# Altium PCB PCB.PcbDoc (part 1 of 2)
Units mil, origin at the board's own origin, x right, y up, seen from the top; angles counter-clockwise.
Board outline 3265 x 2770 mil, 2 copper layers (Top Layer, Bottom Layer); 55 components, 72 nets, 277 pads, 54 vias.
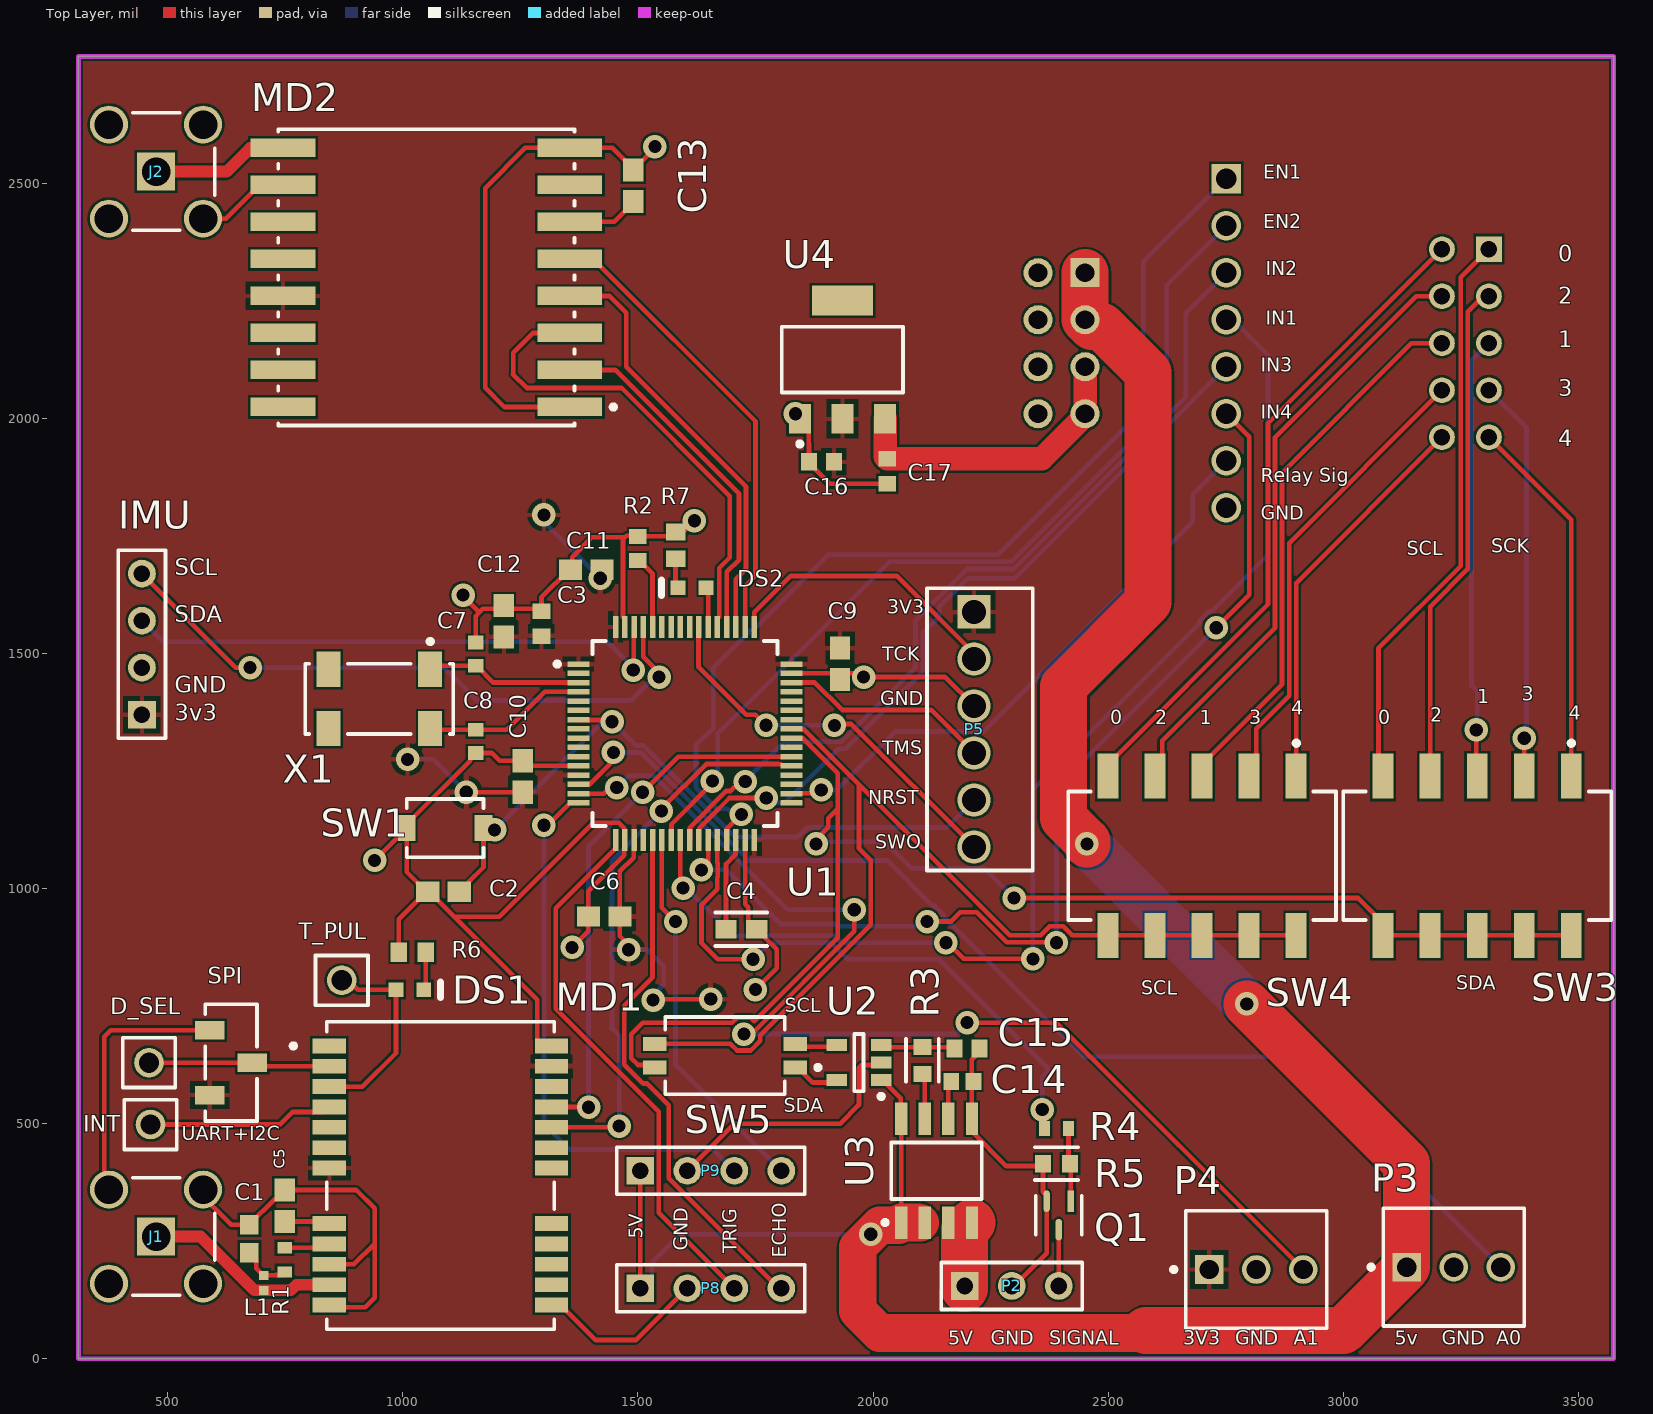
[diagram p0: Top Layer view]
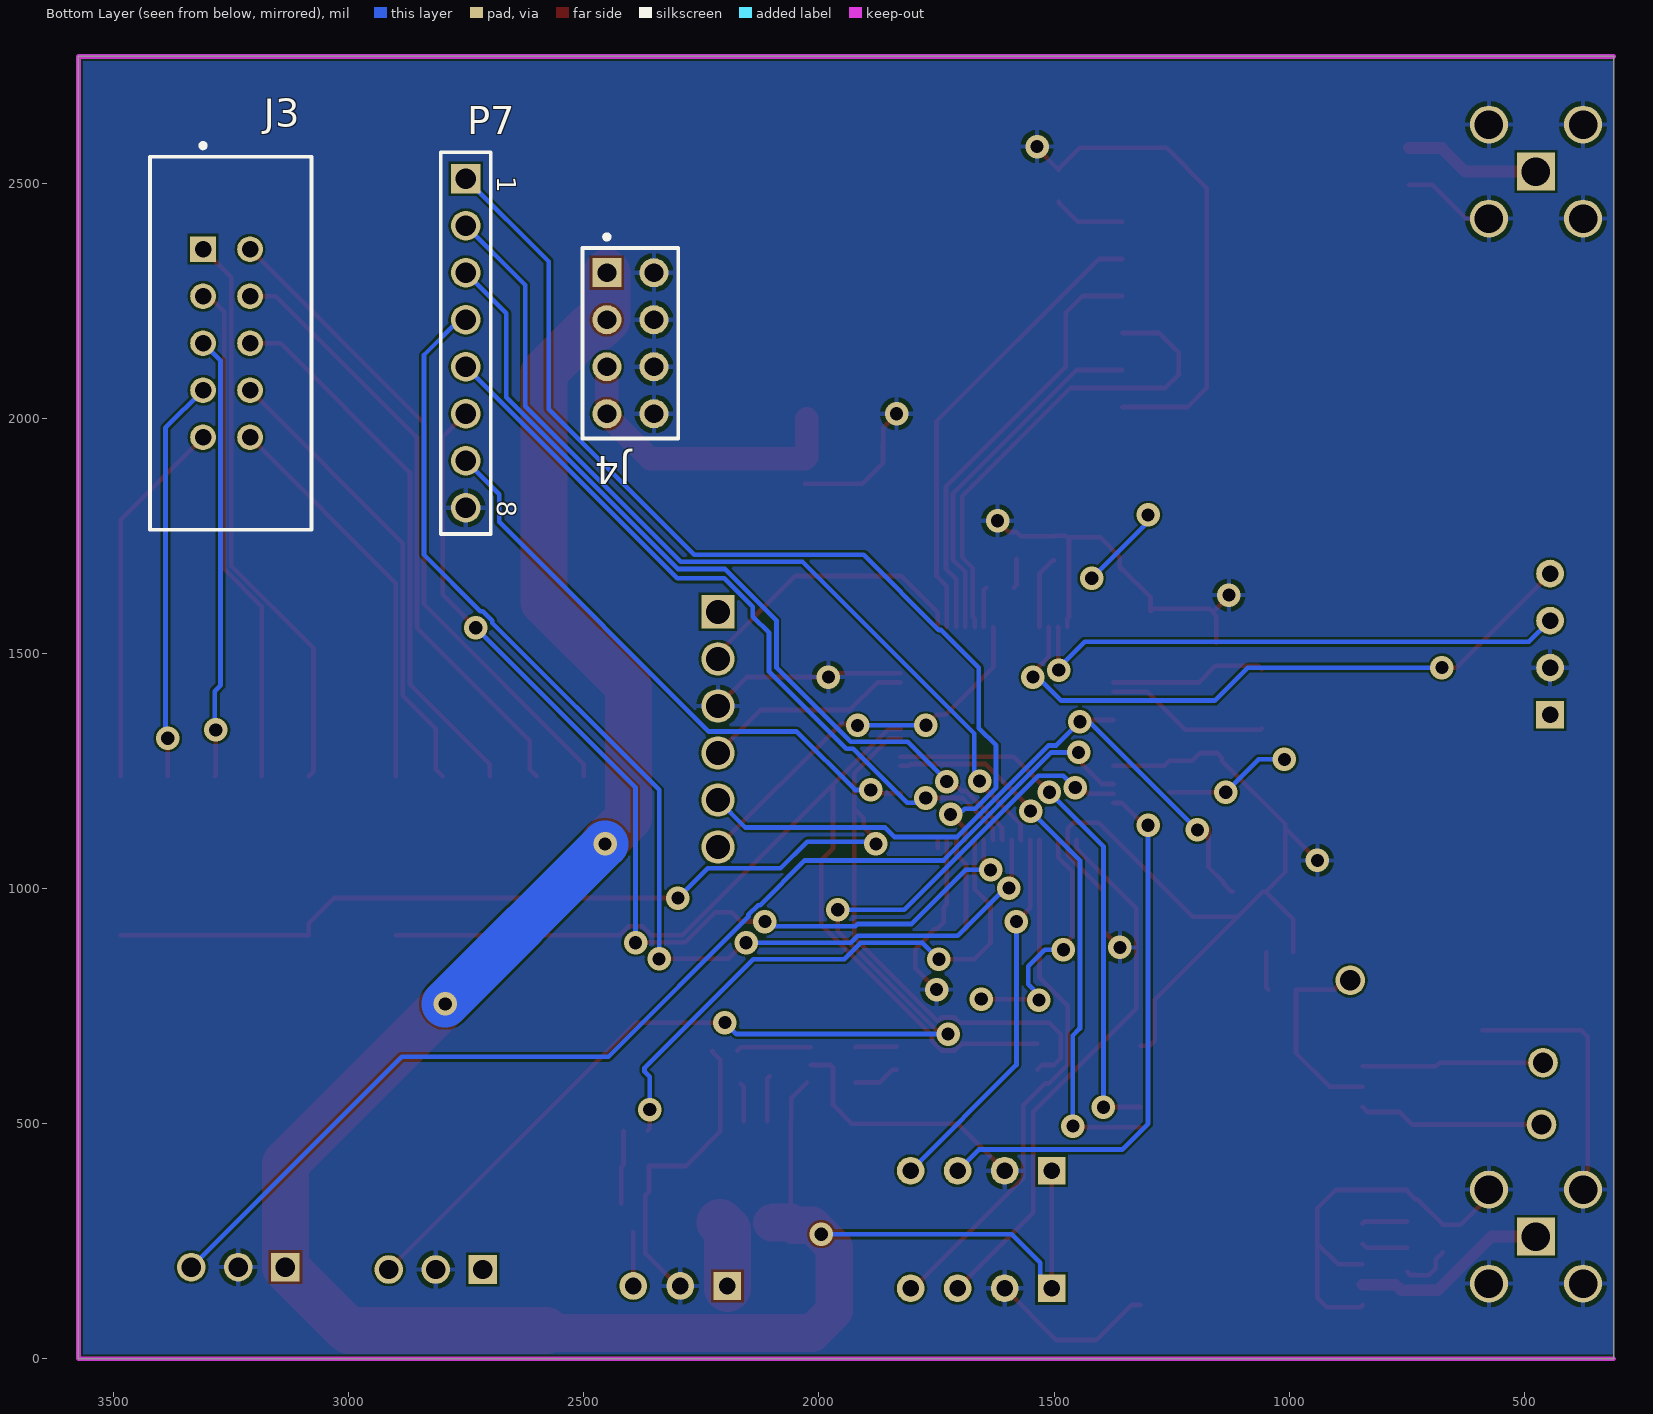
[diagram p1: Bottom Layer view, seen from below]
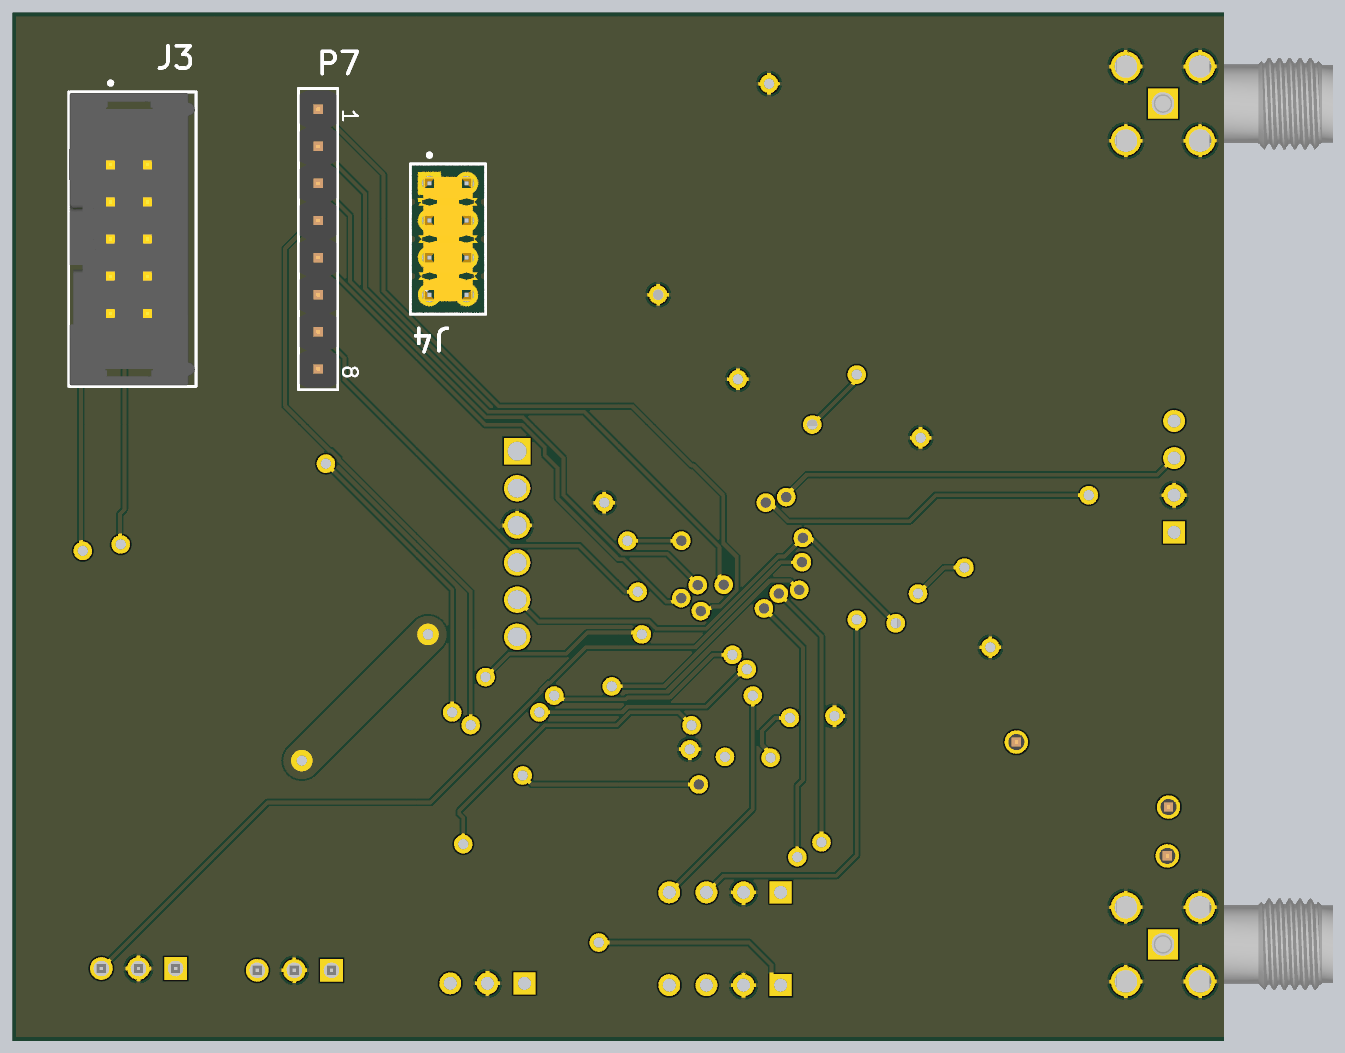
[diagram p2: 3D render of the assembled board from below, using the file's embedded part models]

## Layer stack, top to bottom
Top Solder: solder mask 0.4, Solder Resist, Dk 3.5
Top Layer: signal copper 1.4
Dielectric 1: dielectric 12.6, FR-4, Dk 4.8
Bottom Layer: signal copper 1.4
Bottom Solder: solder mask 0.4, Solder Resist, Dk 3.5

## Board outline
310,0 3575,0 3575,2770 310,2770

## Design rules (kind name [scope] priority, off if disabled: settings)
Clearance [All] p1: gap=5 ignorepadtopadclearanceinfootprint=FALSE except(0: Arc-Hole Track-Hole SMDPad-Hole THPad-Hole Via-Hole Fill-Hole Poly-Hole Region-Hole Text-Hole)
PolygonConnect [All] p1: connectstyle=Relief reliefconductorwidth=10 reliefentries=4 polygonreliefangle="90 Angle" airgapwidth=10
RoutingVias [All] p1: holewidth=28 width=50 viastyle="Through Hole" minholewidth=28 minwidth=50 maxholewidth=28 maxwidth=50
SolderMaskExpansion [All] p1: expansion=4 istentingtop=FALSE
Width [All] p1: maxlimit=100 minlimit=10 preferedwidth=10 minimp=50.000000 maximp=50.000000 favimp=50.000000
30 further rules are at their usual default settings.

## Components (designator, comment, footprint, x,y, rotation, side; value= is the part's Value field where it differs from the comment)
C1 "0603YC104KAT2A" CAPC1608X90X35NL15T15 673.78,255.6 r90 top
C2 "0603YC104KAZ2A" CAPC1608X90X35ML15T15 1086.38,993.62 r180 top
C3 "GRM188R61E105KA12D" CAPC1608X90X35NL10T15 1294.84,1563.62 r270 top
C4 "CL10X475KQ8NNNC" FP-CL10-IPC_A 1719.84,913.62 r180 top
C5 "0603YC104KAZ2A" CAPC1608X90X35ML15T15 748.78,325.6 r90 top
C6 "0603YC104KAZ2A" CAPC1608X90X35ML15T15 1428.06,940.85 r0 top
C7 "GQM1885C2A4R3BB01D" CAPC1608X90X35LL10T15 1154.84,1498.62 r90 top
C8 "GQM1885C2A4R3BB01D" CAPC1608X90X35LL10T15 1154.84,1313.23 r90 top
C9 "0603YC104KAZ2A" CAPC1608X90X35ML15T15 1929.84,1478.62 r90 top
C10 "0603YC104KAZ2A" CAPC1608X90X35ML15T15 1254.84,1238.62 r270 top
C11 "0603YC104KAZ2A" CAPC1608X90X35ML15T15 1389.84,1678.62 r0 top
C12 "0603YC104KAZ2A" CAPC1608X90X35ML15T15 1214.84,1568.62 r270 top
C13 "0603YC104KAZ2A" CAPC1608X90X35ML15T15 1490,2495 r270 top
C14 "1nF" CAPC1608X95X40LL15T15 2190,590 r180 top
C15 "GRM188R60J106ME47D" CAPC1608X90X35NL10T15 2200,660 r180 top
C16 "GRM188R61E105KA12D" CAPC1608X90X35NL10T15 1890.24,1907.72 r0 top
C17 "GRM188R61E105KA12D" CAPC1608X90X35NL10T15 2030.24,1887.72 r90 top
D_SEL "61300111121" 61300111121 460,630 r0 top (schematic designator J5)
DS1 "HSMS-C190" AVAG-HSMX-C190_V 1015,785 r0 top
DS2 "HSMG-C190" AVAG-HSMX-C190_V 1615,1640 r180 top
IMU "Header 4" HDR1X4 445,1370 r90 top (schematic designator P1)
INT "61300111121" 61300111121 463.33,498.34 r0 top (schematic designator J6)
J1 "731000114" MOLX-731000114_V 475,260 r0 top
J2 "731000114" MOLX-731000114_V 475,2525 r0 top
J3 "D2510-6002-AR" FP-D2510-6002-AR-MFG 3251.14,2160 r270 bottom
J4 "HTSW-104-07-G-D" FP-HTSW-104-07-G-D-MFG 2401.14,2160 r270 bottom
L1 "LQG15HS27NJ02D" IND1005X55X25LL5T10 703.78,161.55 r90 top
MD1 "NEO-M9N-00B" FP-NEO-M9N-00B-MFG 1080,390 r90 top
MD2 "RFM95W-868S2" FP-RFM95W-868S2-MFG 1050,2300 r180 top
P2 "Header 3" HDR1X3 2195,155 r0 top
P3 "22-23-2031" MOLX-22-23-2031_V 3235,195 r0 top
P4 "22-23-2031" MOLX-22-23-2031_V 2815,190 r0 top
P5 "640456-6" TECO-640456-6_V 2214.84,1588.62 r270 top
P7 "61300811121" 61300811121 2751.14,2160 r270 bottom
P8 "Header 4" HDR1X4 1505,150 r0 top
P9 "Header 4" HDR1X4 1505,400 r0 top
Q1 "2N7002W" FP-419AB-01-IPC_C 2395,305 r270 top
R1 "RC0603JR-1310RL" RESC1608X55X25LL10T15 748.78,210.6 r270 top
R2 "CRCW060310K0FKEA" RESC1609X50X30NL8T20 1499.84,1723.62 r270 top
R3 "MCT0603MD1002BP100" FP-MCT0603-IPC_B 2105,635 r90 top
R4 "RC0603FR-101KL" RESC1608X55X25LL10T15 2390,490 r0 top
R5 "MCT0603MD1002BP100" FP-MCT0603-IPC_B 2390,415 r0 top
R6 "ERJ3EKF3300V" RESC1608X55X30ML15T15 1020,865 r180 top
R7 "ERJ3EKF3300V" RESC1608X55X30ML15T15 1580,1730 r90 top
SPI "CJS-1201TA" FP-CJS-1201TA-MFG 634.72,630 r270 top (schematic designator SW2)
SW1 "TL1015AF160QG" FP-TL1015AF160QG-MFG 1089.84,1128.62 r0 top
SW3 "219-5LPSTR" FP-219-5LPSTR-MFG 3285,1070 r180 top
SW4 "219-5LPSTR" FP-219-5LPSTR-MFG 2700,1070 r180 top
SW5 "1571983-3" FP-1571983-3-MFG 1685,645 r180 top
T_PUL "61300111121" 61300111121 870,805 r0 top (schematic designator J7)
U1 "STM32F401RET6" FP-LQFP64-5W-MFG 1600,1330 r0 top
U2 "MCP3221A7T-E/OT" SOT-23-OT5_N 1970,630 r180 top
U3 "ACS712ELCTR-05B-T" ALEG-LC-8_V 2135,400 r0 top
U4 "AZ1117EH-3.3TRG1" FP-SOT223-MFG 1935,2125 r90 top
X1 "ABS25-32.768KHZ-6-T" ABRA-ABS25-4_V 949.84,1403.62 r180 top

## Footprints (in the part's own frame and the unit in brackets; to place one, negate y for a bottom-side part, rotate by r counter-clockwise, add the part's x,y. Pads: shape width x height; smd on the part's side, far side on the other; paste and mask are expansions set on the pad)
61300111121 [mm] "Pin Header, pitch 2.54 mm, THT, Vertical, single row, 1p"
  round 1.6 hole 1.1: 1(0,0)
  silkscreen extent -1.42,-1.35 1.42,1.35, body extent -1.27,-1.27 1.27,1.27, height 8.57
61300811121 [mm] "Pin Header, pitch 2.54 mm, THT, Vertical, single row, 8p"
  rect 1.6x1.6 hole 1.1: 1(-8.89,0)
  round 1.6 hole 1.1: 2(-6.35,0) 3(-3.81,0) 4(-1.27,0) 5(1.27,0) 6(3.81,0) 7(6.35,0) 8(8.89,0)
  silkscreen extent -10.31,-1.35 10.31,1.35, body extent -10.16,-1.27 10.16,1.27, height 8.57
ABRA-ABS25-4_V [mm] "SMD, 4-Leads, Body 8x3.8mm, Pitch 5.5mm, Height 2.5mm"
  rect 1.3x1.9 smd: 1(-2.75,-1.6) 2(2.75,-1.6) 3(2.75,1.6) 4(-2.75,1.6)
  silkscreen extent -4,-3.22 4,1.9, body extent -4,-2 4,2, height 2.66
ALEG-LC-8_V [mm] "SOIC, 8-Leads, Body 4.9x3.9mm, Pitch 1.27mm"
  rect 0.65x1.75 smd: 1(-1.905,-2.8) 2(-0.635,-2.8) 3(0.635,-2.8) 4(1.905,-2.8) 5(1.905,2.8) 6(0.635,2.8) 7(-0.635,2.8) 8(-1.905,2.8)
  silkscreen extent -2.9,-2.92 2.45,1.53, body extent -2.45,-1.95 2.45,1.95, height 1.75
AVAG-HSMX-C190_V [mm] "SMD, 2-Leads, Body 1.6x0.8mm, Height 0.9mm"
  rect 0.8x0.8 smd: 1(-0.75,0) 2(0.75,0)
  silkscreen extent 1.65,-0.4 1.65,0.4, body extent -0.8,-0.4 0.8,0.4, height 0.9
CAPC1608X90X35LL10T15 [mm] "Chip Capacitor, 2-Leads, Body 1.60x0.80mm, IPC High Density"
  rect 0.75x0.85 smd: 1(-0.625,0) 2(0.625,0)
  body extent -0.85,-0.45 0.85,0.45, height 0.9
CAPC1608X90X35ML15T15 [mm] "Chip Capacitor, 2-Leads, Body 1.60x0.81mm, IPC Low Density"
  rect 1.25x1.1 smd: 1(-0.85,0) 2(0.85,0)
  body extent -0.88,-0.48 0.87,0.48, height 0.9
CAPC1608X90X35NL10T15 [mm] "Chip Capacitor, 2-Leads, Body 1.60x0.80mm, IPC Medium Density"
  rect 0.85x0.95 smd: 1(-0.675,0) 2(0.675,0)
  body extent -0.85,-0.45 0.85,0.45, height 0.9
CAPC1608X90X35NL15T15 [mm] "Chip Capacitor, 2-Leads, Body 1.75x0.95mm, IPC Medium Density"
  rect 1.05x1 smd: 1(-0.75,0) 2(0.75,0)
  body extent -0.88,-0.48 0.87,0.48, height 0.9
CAPC1608X95X40LL15T15 [mm] "Chip Capacitor, 2-Leads, Body 1.60x0.80mm, IPC High Density"
  rect 0.85x0.9 smd: 1(-0.6,0) 2(0.6,0)
  body extent -0.87,-0.48 0.88,0.48, height 0.95
FP-219-5LPSTR-MFG [mm]
  rect 1.13x2.44 smd paste+0 mask+0: 1(-5.08,-4.3) 2(-2.54,-4.3) 3(0,-4.3) 4(2.54,-4.3) 5(5.08,-4.3) 6(5.08,4.3) 7(2.54,4.3) 8(0,4.3) 9(-2.54,4.3) 10(-5.08,4.3)
  silkscreen extent -7.23,-6.2 7.23,3.47, body extent -7.33,-5.62 7.33,5.62, height 0.25
FP-419AB-01-IPC_C [mm]
  rect 1.164x0.336 smd paste+0 mask+0: 1(-0.77,0.65)
  rrect100% 1.164x0.336 smd paste+0 mask+0: 2(-0.77,-0.65) 3(0.77,0)
  silkscreen extent -1.05,-1.25 1.05,1.25
FP-1571983-3-MFG [mm]
  rect 1.27x0.76 smd paste+0 mask+0: 1(-3.795,0.635) 2(-3.795,-0.635) 3(3.795,-0.635) 4(3.795,0.635)
  silkscreen extent -5.15,-2.08 3.22,2.08, body extent -4.53,-2.18 4.53,2.18, height 0.25
FP-CJS-1201TA-MFG [mm]
  rect 1x1.6 smd paste+0 mask+0: 1(-1.75,-1.15) 2(0,1.15) 3(1.75,-1.15)
  silkscreen extent -3.15,-1.4 3.15,1.4, body extent -3.25,-2.05 3.25,2.05, height 0.25
FP-CL10-IPC_A [mil]
  rect 45.6x39.85 smd paste+0 mask+0: 1(-32.56,0) 2(32.56,0)
  silkscreen extent -55,-36 55,36, body extent -75,-40 75,40, height 10
FP-D2510-6002-AR-MFG [mm]
  rect 1.39x1.39 hole 0.89 paste-1000 mask+0: 1(-5.08,-1.495)
  round 1.39 hole 0.89 paste-1000 mask+0: 2(-5.08,1.045) 3(-2.54,-1.495) 4(-2.54,1.045) 5(0,-1.495) 6(0,1.045) 7(2.54,-1.495) 8(2.54,1.045) 9(5.08,-1.495) 10(5.08,1.045)
  silkscreen extent -10.8,-4.36 10.07,4.36, body extent -10.01,-4.34 10.01,4.29, height 10.04
FP-HTSW-104-07-G-D-MFG [mm]
  rect 1.57x1.57 hole 1.02 paste-1000 mask+0: 1(-3.81,-1.27)
  round 1.57 hole 1.02 paste-1000 mask+0: 2(-3.81,1.27) 3(-1.27,-1.27) 4(-1.27,1.27) 5(1.27,-1.27) 6(1.27,1.27) 7(3.81,-1.27) 8(3.81,1.27)
  silkscreen extent -5.87,-2.58 5.14,2.58, body extent -5.08,-2.51 5.08,2.51, height 8.71
FP-LQFP64-5W-MFG [mm]
  rect 1.2x0.3 smd paste+0 mask+0: 1(-5.75,3.75) 2(-5.75,3.25) 3(-5.75,2.75) 4(-5.75,2.25) 5(-5.75,1.75) 6(-5.75,1.25) 7(-5.75,0.75) 8(-5.75,0.25) 9(-5.75,-0.25) 10(-5.75,-0.75) 11(-5.75,-1.25) 12(-5.75,-1.75) 13(-5.75,-2.25) 14(-5.75,-2.75) 15(-5.75,-3.25) 16(-5.75,-3.75) 33(5.75,-3.75) 34(5.75,-3.25) 35(5.75,-2.75) 36(5.75,-2.25) 37(5.75,-1.75) 38(5.75,-1.25) 39(5.75,-0.75) 40(5.75,-0.25) 41(5.75,0.25) 42(5.75,0.75) 43(5.75,1.25) 44(5.75,1.75) 45(5.75,2.25) 46(5.75,2.75) 47(5.75,3.25) 48(5.75,3.75)
  rect 0.3x1.2 smd paste+0 mask+0: 17(-3.75,-5.75) 18(-3.25,-5.75) 19(-2.75,-5.75) 20(-2.25,-5.75) 21(-1.75,-5.75) 22(-1.25,-5.75) 23(-0.75,-5.75) 24(-0.25,-5.75) 25(0.25,-5.75) 26(0.75,-5.75) 27(1.25,-5.75) 28(1.75,-5.75) 29(2.25,-5.75) 30(2.75,-5.75) 31(3.25,-5.75) 32(3.75,-5.75) 49(3.75,5.75) 50(3.25,5.75) 51(2.75,5.75) 52(2.25,5.75) 53(1.75,5.75) 54(1.25,5.75) 55(0.75,5.75) 56(0.25,5.75) 57(-0.25,5.75) 58(-0.75,5.75) 59(-1.25,5.75) 60(-1.75,5.75) 61(-2.25,5.75) 62(-2.75,5.75) 63(-3.25,5.75) 64(-3.75,5.75)
  silkscreen extent -7.02,-5 5,5, body extent -6.45,-6.45 6.45,6.45, height 0.25
FP-MCT0603-IPC_B [mil]
  rect 34x37.88 smd paste+0 mask+0: 1(-28.72,0) 2(28.72,0)
  silkscreen extent -46,-35 46,35, body extent -56,-29 56,29, height 10
FP-NEO-M9N-00B-MFG [mm]
  rect 0.8x1.8 smd paste-1000 mask-1000: 1(7,6) 2(5.9,6) 3(4.8,6) 4(3.7,6) 5(2.6,6) 6(1.5,6) 7(0.4,6) 8(-2.6,6) 9(-3.7,6) 10(-4.8,6) 11(-5.9,6) 12(-7,6) 13(-7,-6) 14(-5.9,-6) 15(-4.8,-6) 16(-3.7,-6) 17(-2.6,-6) 18(0.4,-6) 19(1.5,-6) 20(2.6,-6) 21(3.7,-6) 22(4.8,-6) 23(5.9,-6) 24(7,-6)
  silkscreen extent -8.3,-6.15 8.3,8.07, body extent -8.4,-7.4 8.4,7.4, height 0.25
FP-RFM95W-868S2-MFG [mm]
  rect 3.5x1 smd paste+0 mask+0: 1(-7.75,7) 2(-7.75,5) 3(-7.75,3) 4(-7.75,1) 5(-7.75,-1) 6(-7.75,-3) 7(-7.75,-5) 8(-7.75,-7) 9(7.75,-7) 10(7.75,-5) 11(7.75,-3) 12(7.75,-1) 13(7.75,1) 14(7.75,3) 15(7.75,5) 16(7.75,7)
  silkscreen extent -10.23,-8 8,8, body extent -9.6,-8.1 9.6,8.1, height 0.25
FP-SOT223-MFG [mm]
  rect 1.6x1.2 smd paste+0 mask+0: 1(-3.2,2.3) 2(-3.2,0) 3(-3.2,-2.3)
  rect 1.6x3.3 smd paste+0 mask+0: 4(3.2,0)
  silkscreen extent -4.67,-3.27 1.78,3.27, body extent -4.1,-3.37 4.1,3.37, height 0.25
FP-TL1015AF160QG-MFG [mm]
  rect 0.95x1.4 smd paste+0 mask+0: 1(-2.075,0) 2(2.075,0)
  silkscreen extent -2.07,-1.58 2.07,1.58, body extent -2.65,-1.68 2.65,1.68, height 0.25
HDR1X3 [mm] "Connector; Header; 3 Position"
  rect 1.5x1.5 hole 0.9: 1(0,0)
  round 1.5 hole 0.9: 2(2.54,0) 3(5.08,0)
  silkscreen extent -1.27,-1.27 6.35,1.27
HDR1X4 [mm] "Connector; Header; 4 Position"
  rect 1.5x1.5 hole 0.9: 1(0,0)
  round 1.5 hole 0.9: 2(2.54,0) 3(5.08,0) 4(7.62,0)
  silkscreen extent -1.27,-1.27 8.89,1.27
IND1005X55X25LL5T10 [mm] "Chip Inductor, 2-Leads, Body 1.05x0.55mm, IPC High Density"
  rect 0.49x0.52 smd: 1(-0.405,0) 2(0.405,0)
  body extent -0.53,-0.28 0.53,0.28, height 0.55
MOLX-22-23-2031_V [mm] "CONN, 3-Leads, Body 7.62x6.35mm, Pitch 2.54mm"
  rect 1.55x1.55 hole 1.05: 1(-2.54,0)
  round 1.55 hole 1.05: 2(0,0) 3(2.54,0)
  silkscreen extent -4.58,-3.17 3.81,3.17, body extent -3.73,-3.25 3.73,3.1, height 10.67
MOLX-731000114_V [mm] "Connector, 5-Leads, Body 14.8x6.35mm, Pitch 2.54mm"
  rect 2.05x2.05 hole 1.54: 1(0,0)
  round 2.05 hole 1.54: 2(-2.54,2.54) 3(-2.54,-2.54) 4(2.54,-2.54) 5(2.54,2.54)
  silkscreen extent -1.26,-3.17 3.17,3.17, body extent -11.62,-3.17 3.18,3.18, height 9.57
RESC1608X55X25LL10T15 [mm] "Chip Resistor, 2-Leads, Body 1.60x0.80mm, IPC High Density"
  rect 0.6x0.8 smd: 1(-0.65,0) 2(0.65,0)
  body extent -0.85,-0.45 0.85,0.45, height 0.55
RESC1608X55X30ML15T15 [mm] "Chip Resistor, 2-Leads, Body 1.60x0.80mm, IPC Low Density"
  rect 0.9x1.05 smd: 1(-0.725,0) 2(0.725,0)
  body extent -0.87,-0.48 0.87,0.48, height 0.55
RESC1609X50X30NL8T20 [mm] "Chip Resistor, 2-Leads, Body 1.65x0.95mm, IPC Medium Density"
  rect 0.8x0.95 smd: 1(-0.65,0) 2(0.65,0)
  body extent -0.82,-0.48 0.82,0.48, height 0.5
SOT-23-OT5_N [mm] "SOT23, 5-Leads, Body 2.9x1.7mm, Pitch 0.95mm, Lead Span 2.8mm, IPC Medium Density"
  rect 1.1x0.65 smd: 1(-1.2,0.95) 2(-1.2,0) 3(-1.2,-0.95) 4(1.2,-0.95) 5(1.2,0.95)
  silkscreen extent -1.33,-1.55 0.25,1.95, body extent -0.9,-1.55 0.9,1.55, height 1.45
TECO-640456-6_V [mm] "THD, 6-Leads, Body 15.24x5.72mm, Pitch 2.54mm"
  rect 1.8x1.8 hole 1.3: 1(0,0)
  round 1.8 hole 1.3: 2(2.54,0) 3(5.08,0) 4(7.62,0) 5(10.16,0) 6(12.7,0)
  silkscreen extent -1.27,-2.54 13.97,3.18, body extent -1.27,-2.54 13.97,3.18, height 10.03

## Part data
C1: library part CMP-1661-00001-4, "Chip Capacitor, 100 nF, +/- 10%, 16 V, -55 to 125 degC, 0603 (1608 Metric), RoHS, Tape and Reel", Manufacturer=AVX, Max Operating Temperature="125 degC", Min Operating Temperature="-55 degC", Package Quantity=4000, Voltage Rating="16 V", ComponentLink1Description="Manufacturer URL", ComponentLink1URL=http://www.avx.com/, ComponentLink2Description=Datasheet, ComponentLink2URL=http://datasheets.avx.com/X7RDielectric.pdf, DatasheetVersion=06/2016, Height="0.9 mm", Length="1.6 mm", Mount="Surface Mount", Mounting Technology="Surface Mount", PackageDescription="2-Pin Surface Mount Device, Body 1.6 x 0.81 mm", PackageReference=0603, Packaging="Tape and Reel", Pins=2, REACH SVHC="No SVHC", RoHSCompliant=true
C2 C5 C6 C9 C10 C11 C12 C13: library part CMP-2006-04496-1, Manufacturer="AVX Interconnect / Elco", Part Number=0603YC104KAZ2A
C3 C16 C17: library part CMP-2006-02459-1, Manufacturer=Murata, Part Number=GRM188R61E105KA12D
C4: library part CMP-13271-001817-1, "Cap Ceramic 4.7uF 6.3V X6S ±10% Pad SMD 0603 +105°C T/R", Capacitance=4.7uF, Case Code (Imperial)=0603, Case Code (Metric)=1608, Dielectric=X6S, Max Operating Temperature=105°C, Min Operating Temperature=-55°C, Package Quantity=1, Tolerance=10%, Voltage Rating=6.3V, Case/Package=0603, Depth=0.8mm, Height=0.8mm, Lead Free="Lead Free", Length=1.6mm, Mount="Surface Mount", Packaging="Tape and Reel", Radiation Hardening=No, Thickness=0.035inch, Voltage Rating (DC)=6.3V, Width=0.031inch
C7 C8: library part CMP-2006-02448-1, Manufacturer=Murata, Part Number=GQM1885C2A4R3BB01D
C14: library part CMP-2006-02121-1, Manufacturer=Vitramon, Part Number=VJ0603Y102KXACW1BC
C15: library part CMP-2006-02792-1, Manufacturer=Murata, Part Number=GRM188R60J106ME47D
D_SEL INT T_PUL: library part CMP-1502-01058-1, "THT Vertical Pin Header WR-PHD, Pitch 2.54 mm, Single Row, 1 pins", Contact Resistance=20mOhm, Manufacturer="Wurth Elektronik", Operating Temperature=-40to105degC, Rated Current=3A, Withstanding Voltage=500VAC, Working Voltage=250VAC, Datasheet URL=https://katalog.we-online.de/em/datasheet/6130xx11121.pdf, Gender=Male, Manufacturer URL=http://www.we-online.de, Mounting Technology=THT, Orientation=Vertical, Package Reference=61300111121, Packaging=Bag, Part Number=61300111121, Pin Number=1, Pitch=2.54mm, Publisher=WurthElektronik, Row Number=Single
DS1: library part CMP-2000-06427-1, "LED Uni-Color Red, 52 mW, 20 mA, -40 to 85 degC, 2-Pin SMD, RoHS, Tape and Reel", Emitting Color=Red, Forward Current=25mA, Forward Voltage=2.6V, Manufacturer=Avago, Operating Temp Range=-40Cto85C, Operating Temperature Classification=Industrial, Package Description="2-Pin Surface Mount Device, Body 1.6 x 0.8 mm, Height 0.9 mm", Package Reference=HSMX-C190, Package Type=ChipLed, Power Dissipation=52W, Reverse Voltage=5V, Test Current (It)=20mA, Chip Material=GaP, Datasheet URL=http://docs.avagotech.com/docs/AV02-0551EN, Datasheet Version=03/2012, DELETED=Compliant, Dominant Wave Length=626nm, High Brightness=No, Lens Dimensions=1x0.8x0.5mm, Lens Type=ColorlessDiffused, Lum Intensity=10mcd, Luminous Intensity=10mcd, Main Category=ChipLED, Manufacturer URL=http://www.avagotech.com/, Mounting=SurfaceMount, Mounting Technology=SurfaceMount, Number of  Elements=1, Packaging=TapeandReel, Peak Wavelength=630nm, Pin Count=2, Product Depth (mm)=0.8mm, Product Height (mm)=0.8mm, Product Length (mm)=1.6mm, Rad Hardened=No, Shape Type=Rectangular, Type=Uni-Color, Viewing Angle=170deg
DS2: library part CMP-1744-00002-1, "Chip LED, Green, 2.2 V, -40 to 85 degC, 2-Pin SMD, RoHS, Tape and Reel", Case\Package=SOIC, Clock Frequency="100 KHz", Frequency="400 KHz", Max Operating Temperature="85 degC", Max Supply Voltage="5.5 V", Min Operating Temperature="-40 degC", Min Supply Voltage="1.7 V", Nominal Supply Current="2 mA", Package Quantity=3000, Access Time="3500 ns", ComponentLink1Description="Manufacturer URL", ComponentLink1URL=http://www.avagotech.com/, ComponentLink2Description=Datasheet, ComponentLink2URL=http://docs.avagotech.com/docs/AV02-0551EN, ComponentLink3Description="Package Specification", ComponentLink3URL=http://www.fairchildsemi.com/dwg/MA/MA03D.pdf, DatasheetVersion=Mar-12, Density="32 kb", Height="1.5 mm", Interface=Serial, Length="5 mm", Max Clock Frequency="100 KHz", Mount="Surface Mount", PackageDescription="2-Pin Surface Mount Device, Body 1.6 x 0.8 mm, Height 0.9 mm", PackageReference=HSMX-C190, Packaging="Tape and Reel", Pins=8, Radiation Hardening=No, REACH SVHC="No SVHC", RoHSCompliant=true, Width="4 mm"
IMU P8 P9: "Header, 4-Pin", LatestRevisionDate=17-Jul-2002, LatestRevisionNote="Re-released for DXP Platform.", Publisher="Altium Limited"
J1 J2: library part CMP-2000-05487-1, "SMA Right-Angle PCB Jack Receptacle, Brass Body, Gold Plated, 50 Ohm, 5-Pin THD, RoHS, Tray", Manufacturer=Molex, Package Description="5-Pin Through Hole Device, Body 14.8 x 6.35 mm, Pitch 2.54 mm", Datasheet URL=http://www.molex.com/webdocs/datasheets/pdf/en-us/0731000114_RF_COAX_CONNECTORS.pdf, Datasheet Version=09/2016, Manufacturer URL=http://www.molex.com/, Mounting Technology=ThroughHole, Package Reference=731000114, Package URL=http://www.molex.com/pdm_docs/sd/731000114_sd.pdf
J3: library part CMP-05379-000002-1, "CONN HEADER VERT 10POS 2.54MM", Current Rating=1.75A, Manufacturer=3M, Temperature="-55°C to +105°C", Temperature Range High=+105°C, Temperature Range Low=-55°C, Automotive=No, Category=Conn, ComponentLink2Description=Datasheet, ComponentLink2URL=http://multimedia.3m.com/mws/media/485877O/3m-four-wall-header-d2500-series-ts-2244.pdf, Conn Gender=Male, Conn Orientation=Straight, Contact Material=Gold,Nickel, Device Class L1=Connectors, Device Class L2="Headers and Wire Housings", Device Class L3=unset, Digikey Description="CONN HEADER VERT 10POS 2.54MM", Height=10.04mm, Lead Free=Yes, Manufacturer Part Number=D2510-6002-AR, Mouser Description="Headers & Wire Housings 10P 4WALL HEADER STRT L-PRO THRU-HOLE", Number Of Contacts=10, Number Of Rows=2, Octopart=https://octopart.com/d2510-6002-ar-3m-8399032, Package=D2510-6002-AR, Pitch=2.54mm, RoHS=TRUE
J4: library part CMP-02766-000066-1, "CONN HEADER VERT 8POS 2.54MM", Current Rating=6.3A, Manufacturer=Samtec, Temperature="-55°C to +125°C", Temperature Range High=+125°C, Temperature Range Low=-55°C, Voltage Rating=550V, Automotive=No, Category=Conn, ComponentLink2Description=Datasheet, ComponentLink2URL=http://suddendocs.samtec.com/prints/htsw-xxx-xx-xxx-x-xx-xx-xx-mkt.pdf, Conn Gender=Male, Conn Orientation=Straight, Contact Material=Gold,Nickel, Device Class L1=Connectors, Device Class L2="Headers and Wire Housings", Device Class L3=unset, Digikey Description="CONN HEADER VERT 8POS 2.54MM", Footprint Url=http://suddendocs.samtec.com/prints/htsw-xxx-xx-xxx-x-xx-xx-xx-footprint.pdf, Height=8.71mm, Lead Free=Yes, Manufacturer Part Number=HTSW-104-07-G-D, Number Of Contacts=8, Number Of Rows=2, Octopart=https://octopart.com/htsw-104-07-g-d-samtec-10613822, Package=HTSW-104-07-G-D, Pitch=2.54mm, RoHS=TRUE
L1: library part CMP-2000-06578-1, "Chip Inductor, 27 nH, 5%, 300 mA, -55 to 125 degC, 2-Pin SMD (0402), RoHS, Tape and Reel", Current Rating=300mA, DC Resistance (DCR)=460mOhmMax, Frequency - Self Resonant=1.7GHz, Frequency - Test=100MHz, Inductance=27nH, Manufacturer=Murata, Operating Temperature=-55°C~125°C, Package / Case=0402(1005Metric), Package Description="2-Pin Surface Mount Device, Body 1 x 0.5 mm", Package Reference=0402, Q @ Freq=8@100MHz, Standard Package=10,000, Tolerance=±5%, Catalog Drawings=LQG15HSSeriesTopLQG15HSSeriesEnd, Category=Inductors,Coils,Chokes, Datasheet URL=http://download.siliconexpert.com/pdfs/2010/9/19/0/28/16/422/mrt_/manual/l0075s0083lqg15hs.pdf, Datasheet Version=09/2010, Family=FixedInductors, Height - Seated (Max)="0.022\"(0.55mm)", Manufacturer URL=http://www.murata.com/, Material - Core=Air, Mounting Technology=SurfaceMount, Mounting Type=SurfaceMount, Online Catalog=LQG15HxSeries, Other Names=490-2628-2, Packaging=Tape&Reel(TR), Product Training Modules=InductorProducts, Series=LQG15HS, Shielding=Unshielded, Size / Dimension="0.039\"Lx0.020\"W(1.00mmx0.50mm)", Type=Multilayer
MD1: library part CMP-207130-000006-1, "M9 standard precision module", Manufacturer=u-blox, Max Supply Voltage=3.6V, Min Supply Voltage=1.65V, Package=0, Temperature="-40°C to +85°C", Temperature Range High=+85°C, Temperature Range Low=-40°C, Automotive=No, Category=UNK, ComponentLink2Description=Datasheet, ComponentLink2URL=https://www.u-blox.com/sites/default/files/NEO-M9N_DataSheet_%28UBX-19014285%29.pdf, Device Class L1="Integrated Circuits (ICs)", Device Class L2="RF Semiconductors and Devices", Device Class L3="RF Receivers", Footprint Url=https://www.u-blox.com/sites/default/files/NEO-M9N_Integrationmanual_%28UBX-19014286%29.pdf, Height=2.6mm, Interface=I2C,SPI,UART,USB, Lead Free=Yes, Manufacturer Part Number=NEO-M9N-00B, Octopart=https://octopart.com/neo-m9n-00b-u-blox-107315722, RoHS=TRUE, Sensitivity=-167dBm
MD2: library part CMP-204316-000001-1, "RX TXRX MODULE ISM < 1GHZ SMD", Case/Package=SMD/SMT, Current - Receiving=12.1mA, Current - Transmitting=120mA, Frequency=868MHz, Max Operating Temperature=70°C, Min Operating Temperature=-20°C, Data Rate=300Kbps, Interface=SPI, Mount="Surface Mount", Packaging=Bulk, Sensitivity=-123dBm
P2: "Header, 3-Pin", LatestRevisionDate=17-Jul-2002, LatestRevisionNote="Re-released for DXP Platform.", Publisher="Altium Limited"
P3 P4: library part CMP-2000-05242-1, "Male Header, Pitch 2.54 mm, 1 x 3 Position, Height 8.18 mm, Tail Length 3.56 mm, RoHS, Bulk", Current Rating=4A, Manufacturer=Molex, Voltage Rating=250V, Brand=Molex, Contact Gender=Pin(Male), Contact Material=Brass, Contact Plating=Tin, Datasheet URL=https://datasheet.ciiva.com/19472/232274-19472863.pdf, Datasheet Version=Sep-01, Factory Pack Quantity=16000, Housing Material=Nylon, Manufacturer URL=http://www.molex.com/, Mounting Angle=Vertical, Mounting Style=ThroughHole, Number of Positions=3Position, Number Of Rows=1Row, Packaging=Bulk, Pitch=2.54mm, Product=Headers, Product Category=Headers&WireHousings, RoHS=Details, Series=6373, Termination Style=ThroughHole, Tradename=KK, Type=Locking
P5: library part CMP-2000-05661-1, "Male Header, Pitch 2.54 mm, 1 x 6 Position, Height 10.03 mm, Tail Length 3.56 mm, -55 to 105 degC, Bulk", Color=White, Current, Rating="5 /  / A", Flammability Rating=UL94V-0, Manufacturer="TE Connectivity", Package Description="Male Header, Pitch 2.54 mm, 1 x 6 Position, Height 10.03 mm, Tail Length 3.56 mm", Temperature, Operating="-55to+105 /  / °C", Voltage, Rating="250 /  / V", Agency Approvals=CSA,UL, Angle=Straight, Brand/Series=MTA-100Series, Color, Housing=White, Connector Type=MTA-100, Contact Centerline Spacing="0.100 /  / in.", Contact Mating Area Plating=Tin, Contact Plating=Tin, Contact Shape=Square, Contact Termination Area Plating=Tin, Datasheet URL=https://datasheet.ciiva.com/25618/0900766b80eb7fdd-25618163.pdf, Datasheet Version="Rev. W, 05/2005", Length, Overall="0.6 /  / \"", Length, Pin="0.14 /  / \"", Length, Terminal Post="0.14 /  / in.", Manufacturer URL=http://www.te.com/, Material, Contact=CopperAlloy, Material, Housing=Polyester, Mount Angle=Vertical, Mounting Hole Size="0.04 /  / \"", Mounting Technology=ThroughHole, Mounting Type=PCMount, Number Of Contacts=6, Number of Positions=6, Number Of Rows=1, Package Reference=640456-6, Pin Spacing="0.1 /  / \"", Primary Type=InterconnectSystem, Size, Post="0.025 /  / in.", Special Features=Pinstrip, Standards=RoHSCompliant,ELVCompliant,UL94V-0, Termination=Solder, Type=PCBPlug
P7: library part CMP-1502-01076-1, "THT Vertical Pin Header WR-PHD, Pitch 2.54 mm, Single Row, 8 pins", Contact Resistance=20mOhm, Manufacturer="Wurth Elektronik", Operating Temperature=-40to105degC, Rated Current=3A, Withstanding Voltage=500VAC, Working Voltage=250VAC, Datasheet URL=https://katalog.we-online.de/em/datasheet/6130xx11121.pdf, Gender=Male, Manufacturer URL=http://www.we-online.de, Mounting Technology=THT, Orientation=Vertical, Package Reference=61300811121, Packaging=Bag, Part Number=61300811121, Pin Number=8, Pitch=2.54mm, Publisher=WurthElektronik, Row Number=Single
Q1: library part CMP-07173-000098-1, "MOSFET N-CH 60V 115MA SOT-323", Case/Package=SOT-323, Continuous Drain Current (ID)=115mA, Drain to Source Breakdown Voltage=60V, Drain to Source Resistance=7.5R, Gate to Source Voltage (Vgs)=20V, Input Capacitance=50pF, Max Operating Temperature=150°C, Max Power Dissipation=200mW, Min Operating Temperature=-55°C, Package Quantity=1, Threshold Voltage=1.76V, Contact Plating=Tin, Drain to Source Voltage (Vdss)=60V, Element Configuration=Single, Height=1mm, Lead Free="Lead Free", Length=2mm, Mount="Surface Mount", Number of Elements=1, Number of Pins=3, On-State Resistance=7.5R, Packaging="Tape and Reel", Power Dissipation=200mW, Radiation Hardening=No, Rds On Max=7.5R, REACH SVHC="No SVHC", Turn-Off Delay Time=12.5ns, Turn-On Delay Time=5.85ns, Weight=0.03g, Width=1.25mm
R1: library part CMP-2000-04315-1, Manufacturer=Yageo, Part Number=RC0603JR-1310RL
R2: library part CMP-1666-00005-4, "Chip Resistor, 10 KOhm, +/- 1%, 100 mW, -55 to 155 degC, 0603 (1608 Metric), RoHS, Tape and Reel", Manufacturer="Vishay Semiconductor", Max Operating Temperature="155 degC", Min Operating Temperature="-55 degC", Package Quantity=5000, Voltage Rating="75 V", ComponentLink1Description="Manufacturer URL", ComponentLink1URL=http://www.vishay.com/, ComponentLink2Description=Datasheet, ComponentLink2URL=https://datasheet.ciiva.com/11809/0900766b80d98afc-11809037.pdf, DatasheetVersion=06/2012, Height="0.45 mm", Length="1.55 mm", Mounting Technology="Surface Mount", PackageDescription="2-Pin Surface Mount Device, Body 1.575 x 0.85 mm", PackageReference=0603, Packaging="Tape and Reel", REACH SVHC=Unknown, RoHSCompliant=true
R3 R5: library part CMP-02407-000530-1, "RES SMD 100 OHM 1% 1/8W 0603", Case Code (Imperial)=0603, Case Code (Metric)=1608, Max Operating Temperature=155°C, Max Power Dissipation=125mW, Min Operating Temperature=-55°C, Package Quantity=1, RESISTANCE=10kR, Temperature Coefficient=25ppm/°C, Tolerance=0.1%, Voltage Rating=75V, Case/Package=0603, Composition="Thin Film", Contact Plating=Tin, Depth=0.85mm, Features="Automotive AEC-Q200", Height=0.45mm, Lead Free="Lead Free", Length=1.55mm, Military Standard=Not, Number of Terminations=2, Packaging="Tape and Reel", Power Rating=125mW, Radiation Hardening=No, REACH SVHC="No SVHC", Voltage Rating (DC)=75V, Width=0.033inch
R4: library part CMP-2000-04176-1, Manufacturer=Yageo, Part Number=RC0603FR-101KL
R6 R7: library part CMP-2000-00435-1, Manufacturer=Panasonic, Part Number=ERJ3EKF3300V
SPI: library part CMP-71745-000001-1, "SWITCH SLIDE SPDT 100MA 6V", Contact Current Rating=100mA, Contact Resistance=100mΩ, Manufacturer="Copal Electronics Inc", Operating Force=5.9N, Temperature="-40°C to +85°C", Temperature Range High=+85°C, Temperature Range Low=-40°C, Voltage Rating Dc=6V, Automotive=No, Category=Switch, ComponentLink2Description=Datasheet, ComponentLink2URL=https://www.nidec-copal-electronics.com/e/catalog/switch/cjs.pdf, Device Class L1=Electromechanical, Device Class L2=Switches, Device Class L3="Slide Switches", Digikey Description="SWITCH SLIDE SPDT 100MA 6V", Height=2.5mm, Lead Free=Yes, Manufacturer Part Number=CJS-1201TA, Mount="Surface Mount", Octopart=https://octopart.com/cjs-1201ta-nidec+copal-87363567, Package=CJS-1201TA, RoHS=TRUE, Standoff Height=0mm, Throw Configuration=SPDT
SW1: library part CMP-17879-000003-1, "SWITCH TACTILE SPST-NO 0.05A 12V", Case/Package=SMD/SMT, Color=Beige, Contact Current Rating=50mA, Contact Resistance=100mR, Max Operating Temperature=70°C, Max Voltage Rating (DC)=12V, Min Operating Temperature=-20°C, Operating Force=160gf, Package Quantity=1, Actuator Length=0.5mm, Actuator Material=Nylon, Actuator Type=Standard, Contact Material=Silver, Contact Plating=Silver, Current Rating=50mA, Electrical Life=50000Cycles, Illumination Type=Non-Illuminated, Lead Free="Lead Free", Mechanical Life=200000Cycles, Mount="Surface Mount", Orientation=Straight, Packaging="Tape and Reel", REACH SVHC="No SVHC", Switch Function=Off-Mom, Switch Travel=0.2mm, Termination="Gull Wing", Throw Configuration=SPST, Voltage Rating (DC)=12V
SW3 SW4: library part CMP-07018-000003-1, "SWITCH SLIDE DIP SPST 100MA 20V", Current Rating=100mA, Max Operating Temperature=85°C, Max Voltage Rating (DC)=20V, Min Operating Temperature=-55°C, Package Quantity=1000, Actuator Type="Slide (Standard)", Contact Material=Copper, Contact Plating=Gold, Depth=9.91mm, Electrical Life=2000Cycles, Lead Free="Lead Free", Length=0.558inch, Max Current Rating=100mA, Mechanical Life=2000Cycles, Mount="Surface Mount", Number of Positions=5, Orientation=Straight, Packaging="Tape and Reel", Pitch=0.1inch, Radiation Hardening=No, Termination="Gull Wing", Throw Configuration=SPST, Voltage Rating (DC)=20V, Washable=Yes
SW5: library part CMP-03400-000002-1, "SWITCH SLIDE DIP SPST 25MA 24V", Contact Current Rating=25mA, Contact Resistance=100mΩ, Manufacturer="TE Connectivity", Temperature="-30°C to +85°C", Temperature Range High=+85°C, Temperature Range Low=-30°C, Voltage Rating Dc=24V, Automotive=No, Category=Switch, ComponentLink2Description=Datasheet, ComponentLink2URL=https://www.te.com/commerce/DocumentDelivery/DDEController?Action=showdoc&DocId=Customer+Drawing%7F1571983%7FC6%7Fpdf%7FEnglish%7FENG_CD_1571983_C6.pdf%7F1571983-3, Device Class L1=Electromechanical, Device Class L2=Switches, Device Class L3="DIP Switches", Digikey Description="SWITCH SLIDE DIP SPST 25MA 24V", Electromechanical Life=1000Cycles, Height=2.56mm, Lead Free=Yes, Manufacturer Part Number=1571983-3, Mount="Surface Mount", Mouser Description="Switch DIP ON OFF SPST 2 Recessed Slide 0.025A 24VDC Gull Wing 1.27mm SMD T/R", Number Of Circuits=2, Octopart=https://octopart.com/1571983-3-te+connectivity-46507520, Package=1571983-3, RoHS=TRUE, Standoff Height=0.1mm, Throw Configuration=SPST
U1: library part CMP-12105-000004-1, "IC MCU 32BIT 512KB FLASH 64LQFP", Ambient Temperature Range High=+85°C, Ambient Temperature Range Low=-40°C, Frequency=84MHz, Manufacturer=STMicroelectronics, Max Junction Temp=+105°C, Max Supply Voltage=3.6V, Min Supply Voltage=1.65V, Package=LQFP64-5W, Temperature="-40°C to +105°C", Automotive=No, Category=IC, ComponentLink2Description=Datasheet, ComponentLink2URL=https://www.st.com/resource/en/datasheet/stm32f401re.pdf, Core Architecture="ARM Cortex-M4", Data Bus Width=32bits, Device Class L1="Integrated Circuits (ICs)", Device Class L2="Embedded Processors and Controllers", Device Class L3=Microcontrollers, Digikey Description="IC MCU 32BIT 512KB FLASH 64LQFP", Height=1.6mm, Interface=I2C,SPI,USART,USB,IrDA,I2S,SMBus,Other, Ipc Land Pattern Name=QFP50P1200X1200X160-64, Lead Free=Yes, Manufacturer Part Number=STM32F401RET6, Memory Size=512KBytes, Memory Type=FLASH, Mouser Description="ARM Microcontrollers - MCU 16/32-BITS MICROS", Number Of A/D Converters=1, Number Of Adc Channels=12, Number Of Cores=1, Number Of I2C Channels=3, Number Of I/Os=50, Number Of Pwm Channels=23, Number Of Spi Channels=3, Number Of Timers/Counters=8, Number Of Uart Channels=3, Number Of Usb Channels=1, Octopart=https://octopart.com/stm32f401ret6-stmicroelectronics-34185993, Ram Size=96KBytes, RoHS=TRUE, Standoff Height=0.05mm, Temperature Range High=+105°C, Temperature Range Low=-40°C
U2: library part CMP-0188-00722-2, "Low Power 12-Bit A/D Converter With I2C Interface, 5-Pin SOT-23, Extended Temperature, Tape and Reel", Code_IPC=SOT23-5, ComponentLink1Description="Manufacturer URL", ComponentLink1URL=http://www.microchip.com/, ComponentLink2Description=Datasheet, ComponentLink2URL=http://ww1.microchip.com/downloads/en/DeviceDoc/21732c.pdf, ComponentLink3Description="Package Specification", ComponentLink3URL=http://www.microchip.com/stellent/groups/techpub_sg/documents/packagingspec/en012702.pdf, DatasheetVersion="revC, Jul-2006", PackageDescription="5-Lead Plastic Small Outline Transistor (OT) [SOT-23]", PackageReference=SOT-23-OT5, PackageVersion="revBB, Aug-2009", RevisionNote="URLs added."
U3: library part CMP-2000-04989-1, "Linear Current Sensor, 4.5 to 5.5 V, 10 mA Output Current, -40 to 85 degC, 8-Pin SOIC (LC), RoHS, Tape and Reel", Manufacturer="Allegro Microsystems", Operating Temperature Max=85degC, Operating Temperature Min=-40degC, Operating Temperature Range=-40degCto+85degC, Package Description="8-Pin Small Outline Integrated Circuit, Body 4.9 x 3.9 mm, Pitch 1.27 mm", Package Reference=LC-8, Quiescent Current=8mA, Sensor Case Style=SOIC, Supply Voltage Max=5.5V, Supply Voltage Min=4.5V, Supply Voltage Range=4.5Vto5.5V, Accuracy=1.5%, Bandwidth=50kHz, Datasheet URL=http://www.allegromicro.com/~/media/Files/Datasheets/ACS712-Datasheet.ashx?la=en, Datasheet Version="Rev. 15, 11/2012", Manufacturer URL=http://www.allegromicro.com/, MSL=MSL2-1year, No. of Pins=8, Polarisation=Unipolar, Sensor / Transducer Type=Current, SVHC=NoSVHC(19-Dec-2012), Termination Type=SMD
U4: library part CMP-12756-000039-1, "IC REG LINEAR 3.3V 1A SOT223", Case/Package=TO-261-4, Dropout Voltage=1.1V, Max Input Voltage=13V, Max Operating Temperature=125°C, Max Output Current=1A, Min Operating Temperature=-40°C, Operating Supply Current=3.5mA, Output Voltage=3.3V, Package Quantity=4000, Power Supply Rejection Ratio (PSRR)=70dB, Reference Voltage=1.262V, Accuracy=1%, Contact Plating=Tin, Lead Free="Lead Free", Mount="Surface Mount", Number of Outputs=1, Number of Pins=3, Number of Regulators=1, Output Current=1A, Output Type=Fixed, Packaging="Tape and Reel", Polarity=Positive, Quiescent Current=3.5mA, Weight=0.000282oz
X1: library part CMP-2000-05036-1, "Low Frequency Crystal, 32.768 KHz, 6 pF, +/- 20 ppm, -40 to 85 degC, 4-Pin SMD, RoHS, Tape and Reel", Case Height=2.5mm, Case Length=8mm, Case Width=3.8mm, Frequency=32.768kHz, Load Capacitance=6pF, Manufacturer=Abracon, Operating Temperature Range=-40Cto+85C, Package / Case=8mmx3.8mm, Package Description="4-Pin Surface Mount Device, Body 8 x 3.8 mm, Pitch 5.5 mm", Package Reference=ABS25, Tolerance=20PPM, Brand=ABRACON, Datasheet URL=https://datasheet.ciiva.com/854/abs25-854528.pdf, Datasheet Version=Jun-17, Dimensions=3.8mmWx8mmLx2.5mmH, ESR=50kOhms, Factory Pack Quantity=3000, Manufacturer URL=http://www.abracon.com/, Mounting Style=SMD/SMT, Packaging=Reel, Product Category=Crystals, RoHS=Details, Series=ABS25, Termination Style=SMD/SMT, Type=LowFrequencyCrystal

## Via types
v1: diameter 50, hole 28, Top Layer to Bottom Layer, 54 vias

## Nets (pads, with @x,y where several pads share a name; then routed paths per layer and width w, separated by ;. In a path a pad name is that pad's centre, name@x,y a point inside that pad or via, vN(x,y) a via of type N, cw(c..) or ccw(c..) an arc to the next point about the centre after c; other vN are vias at no path point)
5V_Servo: P2.1 U3.3 U3.4 | length 146
  Top Layer w100: P2.1@2195,150 2195,274.76 U3.4
+3V3: C3.2 C6.2 C9.2 C10.2 C11.2 C12.2 C16.2 IMU.1 MD1.7 MD1.23 MD2.13 P4.1 P5.1 SPI.3 U1.1 U1.13 U1.19 U1.32 U1.48 U1.64 U4.2 | length 1044.4
  Top Layer w10: v1(1135,1205) 1254.68,1205 C10.2 ; v1(1419.86,1660.29) 1419.86,1675.18 C11.2 ; v1(1480,870) 1480,880.82 1461.53,899.3 C6.2 1461.53,1036.53 1490.83,1065.83 1490.83,1102.72 U1.19 ; v1(1532.17,762.83) 1534.34,765 v1(1655,765) ; U1.32@1747.64,1085.91 U1.32
  Bottom Layer w10: v1(1010,1275) 1065,1275 v1(1135,1205) ; v1(1300,1795) 1300,1780.15 v1(1419.86,1660.29) ; v1(1480,870) 1520,870 1555,835 1555,796.48 1532.17,773.65 v1(1532.17,762.83)
+5: J4.1 J4.3 P3.1 P8.1 P9.1 U2.1 U3.1 U3.2 U3.8 | length 5211.6
  Top Layer w10: P8.1 P9.1 ; U2.1@2026.1,587.6 2059.02,554.68 2059.02,506.22 2060,505.24 U3.1@2060,290
  Top Layer w80: U3.1 2054.6,284.36 2014.36,284.36 1967.5,237.5 1967.5,101.86 2014.36,55 2575.75,55 2580.75,60 ; U3.1@2060,290 2095,290 2095.24,289.76 U3.2@2100,289.76
  Top Layer w100: J4.1 J4.3 2465.24,2195.91 2486.72,2195.91 2585,2097.63 2585,1610 2405,1430 2405,1150 2455,1100 v1(2455,1095) ; 2580.75,60 3000,60 P3.1 3135,415 v1(2795,755)
  Bottom Layer w10: P8.1 1529.53,174.53 1529.53,204.53 1590,265 v1(1995,265)
  Bottom Layer w100: v1(2455,1095) v1(2795,755)
A0: P3.3 U1.14 | length 2456
  Top Layer w10: U1.14 1374.53,1222.64 1398.51,1222.64 1440.04,1264.17 1440.04,1281.98 v1(1447.7,1289.63)
  Bottom Layer w10: v1(1447.7,1289.63) 1505.5,1289.63 1735.13,1060 2030,1060 2125,965 2129.5,965 2150,944.5 2150,940 2447.62,642.38 2887.62,642.38 P3.3
A1: P4.3 U1.15 | length 2508.2
  Top Layer w10: U1.15 1427.05,1202.05 1432.35,1207.35 1447.35,1207.35 v1(1455,1215) ; v1(1725.32,690.8) 1741.51,690.8 1960,909.29 v1(1960,955) ; v1(2200,715) 2390,715 P4.3
  Bottom Layer w10: v1(1455,1215) 1480,1240 1533.92,1240 1818.92,955 v1(1960,955) ; v1(1725.32,690.8) 2175.8,690.8 v1(2200,715)
A2: U1.20
A3: U1.9
A4: U1.8
BATT_VCC: C17.2 J4.5 J4.7 U4.3 | length 655.7
  Top Layer w50: U4.3 C17.2@2025.55,1918.98 ; J4.5 2451.14,2006.8 2358.63,1914.3 C17.2 ; C17.2@2025.55,1918.98 C17.2 ; C17.2@2025.55,1918.98 C17.2
D_SEL: D_SEL.1 MD1.2 SPI.2 | length 387
  Top Layer w10: D_SEL.1 SPI.2 687.72,622.28 MD1.2
Echo1: P8.4 U1.21 | length 1125.6
  Top Layer w10: U1.21 1531.1,811.26 1470.59,750.74 1470.59,625.9 1511.04,585.45 1519.55,585.45 1565.47,539.53 1565.47,383.63 1799.1,150 P8.4
Echo2: P9.4 U1.22 | length 808.9
  Top Layer w10: U1.22 1550.79,959.21 v1(1580,930)
  Bottom Layer w10: v1(1580,930) 1580,625 P9.4
EN1: P7.1 U1.29 | length 2164.7
  Top Layer w10: U1.29 1689.49,1104.53 1689.49,1128.51 1718.78,1157.8 v1(1720,1157.8)
  Bottom Layer w10: v1(1720,1157.8) 1712.35,1165.45 1694.55,1165.45 1690,1170 1667.56,1170 1623.28,1214.28 1623.28,1304.49 1660,1341.21 1660,1470 1740,1550 1745,1550 1905,1710 2265,1710 2575,2020 2575,2333.86 P7.1
EN2: P7.2 U1.23 | length 1950.5
  Top Layer w10: U1.23 1571.38,1104.53 1571.38,1136.88 1658.28,1223.78 v1(1658.28,1228.78)
  Bottom Layer w10: v1(1658.28,1228.78) 1664.13,1234.64 1670,1234.64 1670,1330 2035,1695 2293.79,1695 2625,2026.21 2625,2283.86 P7.2
GND: C1.2 C2.2 C3.1 C4.1 C5.2 C6.1 C7.2 C8.1 C9.1 C10.1 C11.1 C12.1 C13.1 C14.1 C15.1 C16.1 C17.1 IMU.2 J1.2 J1.3 J1.4 J1.5 J2.2 J2.3 J2.4 J2.5 J4.2 J4.4 J4.6 J4.8 MD1.10 MD1.12 MD1.13 MD1.24 MD2.1 MD2.8 MD2.10 P2.2 P3.2 P4.2 P5.3 P7.8 P8.2 P9.2 Q1.2 R2.1 R5.1 R6.2 R7.2 SPI.1 SW1.1 U1.12 U1.18 U1.31 U1.47 U1.63 U2.2 U3.5 U4.1 | length 8304.3
  Top Layer w10: J1.2@360,360 365,365 365,685 378.9,698.9 SPI.1 ; J1.5@560,360 634.87,285.13 C1.2 673.78,286.11 727.13,339.46 732.13,339.46 748.78,356.11 C5.2 900.94,359.06 940,320 940,245 ; J2.4@560,2425 623.82,2425 695.67,2496.85 MD2.10 ; MD1.12 848.19,110 920,110 940,130 940,245 ; MD1.10 896.02,201.02 940,245 ; v1(940,1060) 940,1060.47 SW1.1 ; R6.2 991.46,935.12 1049.96,993.62 1008.15,1035.43 SW1.1 ; C2.2 1055.87,993.62 1109.49,940 ; v1(1128.01,1624.47) 1128.01,1621.83 1162.42,1587.42 ; C7.2 1154.84,1579.84 1162.42,1587.42 ; MD1.13 1335.91,114.41 1410.31,40 1495,40 P8.2 ; MD1.24 1296.54,665.59 1285.79,676.34 1285.79,763.7 1109.49,940 ; MD2.1 1215.59,2024.41 1175,2065 1175,2490 1260.59,2575.59 1268.67,2575.59 MD2.8 1445.83,2575.59 1490,2531.42 C13.1 1536.18,2574.64 v1(1536.18,2578.41) ; v1(1360,875) 1394.6,909.6 C6.1 1394.6,994.6 1471.14,1071.14 1471.14,1102.72 U1.18 1471.14,1104.53 1471.14,1128.51 1459.65,1140 1405,1140 1205,940 1109.49,940 ; U1.12 1265.83,1261.1 C10.1 1205.77,1272.09 1189.23,1288.62 C8.1 1152.87,1288.62 1143.11,1278.86 1143.11,1272.44 1008.15,1137.48 SW1.1 ; U1.63 1472.05,1574.09 1468.27,1577.87 1468.27,1743.27 1472.06,1747.06 ; P9.2 1705,500 1930,500 1970,540 1970,619.14 1975.86,625 U2.2@2017.24,625 ; v1(1620.18,1782.3) 1596.42,1758.54 R7.2 1570.67,1749.21 R2.1 1498.2,1750.86 1475.86,1750.86 1472.06,1747.06 ; U1.31 1727.95,967.05 1734.6,960.4 1734.6,928.55 1749.53,913.62 C4.1 1755.28,913.62 1770.2,898.7 1770.2,895.82 1795,871.02 1795,830.49 v1(1749.84,785.32) ; U1.47 1972.05,1457.95 v1(1980,1450) 2153.46,1450 P5.3 ; v1(1835,2010) 1844.45,2000.55 U4.1 1863.07,1980.39 1863.07,1947.27 1863.67,1946.67 C16.1 1863.67,1905.75 1908.27,1861.15 C17.1 ; C15.1@2226.57,655 2226.57,653.03 2210,636.46 2210,505.24 2210,483.58 2283.58,410 2361.28,410 2361.28,355.62 2369.41,347.49 2369.41,330.32 2369.41,224.41 P2.2@2295,150 ; 1162.42,1587.42 1170,1595 1290.04,1595 C3.1 1294.84,1620.04 1353.43,1678.62 C11.1 1360,1682.24 1360,1705 1402.06,1747.06 1472.06,1747.06
GPS_INT: U1.10
I2C1_SCL: IMU.4 U1.61 | length 1352.8
  Top Layer w10: IMU.4 645,1470 v1(675,1470) ; U1.61 1511.42,1493.08 1545,1459.5 v1(1545,1450)
  Bottom Layer w10: v1(675,1470) 1087.91,1470 1157.91,1400 1485,1400 1535,1450 v1(1545,1450)
I2C1_SDA: IMU.3 U1.62 | length 1183.5
  Top Layer w10: v1(1490,1465) 1490.87,1465.87 1490.87,1555.51 U1.62
  Bottom Layer w10: IMU.3 490,1525 1435,1525 1490,1470 v1(1490,1465)
I2C3_SCL: SW4.6 SW4.7 SW4.8 SW4.9 SW4.10 SW5.3 U1.41 | length 2163.6
  Top Layer w10: SW5.3 1696.62,670 1710.82,655.8 1739.82,655.8 1760.32,676.3 1760.32,688.4 1995,923.08 1995,1060.87 1970,1085.87 1970,1221.73 ; U1.41 1827.28,1338.94 1852.8,1338.94 1970,1221.73 ; SW4.10 SW4.9 SW4.8 SW4.7 SW4.6 2423.79,900.71 2404.5,920 2375.5,920 2356.21,900.71 2291.02,900.71 1970,1221.73
I2C3_SDA: SW3.6 SW3.7 SW3.8 SW3.9 SW3.10 SW5.4 U1.40 | length 2921
  Top Layer w10: SW5.4@1535.59,615 1525.63,624.96 1500.31,624.96 1485.59,639.68 1485.59,690.32 1510.27,715 1700.03,715 1710.82,725.8 1739.82,725.8 1747.56,718.06 1925,895.5 1925,1170 ; U1.40 1827.28,1319.25 1851.27,1319.25 1925,1245.52 1925,1170 ; v1(1878.99,1095) 1878.99,1104.56 1905,1130.56 1905,1150 1925,1170 ; v1(2300,980) 3031.5,980 3085,926.5 SW3.6 SW3.7 SW3.8 SW3.9 SW3.10
  Bottom Layer w10: v1(1878.99,1095) 1883.99,1100 2025,1100 2081.81,1043.19 2236.81,1043.19 v1(2300,980)
IN1: P7.4 U1.24 | length 2528.3
  Top Layer w10: U1.24 1590.16,1014.84 1600,1005 v1(1596.11,1001.11) ; v1(2155,885) 2158.29,885 2192.58,850.71 v1(2340,850.71)
  Bottom Layer w10: v1(1596.11,1001.11) 1603.89,1001.11 1705,900 1917.09,900 1932.09,885 v1(2155,885) ; v1(2340,850.71) 2340,1210 2695,1565 2695,1569.5 2715.5,1590 2720,1590 2840,1710 2840,2135 2765,2210 P7.4
IN2: P7.3 U1.25 | length 1820.7
  Top Layer w10: U1.25 1610.75,1104.53 1610.75,1130.75 1687.8,1207.8 1697.45,1207.8 1717.45,1227.8 v1(1728.28,1227.8)
  Bottom Layer w10: v1(1728.28,1227.8) 1728.28,1229.52 1811.01,1312.25 1932.25,1312.25 2090.13,1470.13 2090.13,1570.13 2200,1680 2300,1680 2665,2045 2665,2223.86 P7.3
IN3: P7.5 U1.26 | length 1623.4
  Top Layer w10: U1.26 1630.43,1104.53 1630.43,1128.51 1651.18,1149.26 1694.72,1192.8 v1(1772.76,1192.8)
  Bottom Layer w10: v1(1772.76,1192.8) 1772.76,1189.94 1780,1182.7 1812.7,1182.7 1927.25,1297.25 1942.25,1297.25 2106.21,1461.21 2106.21,1543.79 2140.74,1578.31 2140.74,1599.53 2201.21,1660 2301.21,1660 2751.14,2109.93 P7.5
IN4: P7.6 U1.27 | length 2228.9
  Top Layer w10: v1(1635,1040) 1649.21,1054.21 U1.27 ; v1(2115,930) 2165,930 2185,950 2220.52,950 2284.81,885.71 2374.29,885.71 2375,885 v1(2390,885) ; v1(2730,1555) 2800,1625 2800,1961.57 2751.57,2010 P7.6
  Bottom Layer w10: v1(1635,1040) 1687.91,1040 1802.91,925 1917.5,925 1922.5,920 2105,920 v1(2115,930) ; v1(2390,885) 2390,1215 v1(2730,1555)
LED: DS2.1 U1.54 | length 85.6
  Top Layer w10: DS2.1 1649.21,1635.31 U1.54
NetC1_1: C1.1 L1.2 R1.2 | length 109.5
  Top Layer w10: C1.1 688.46,211.39 688.46,192.21 703.19,177.49 L1.2 729.02,177.49 729.72,178.2 741.97,178.2 R1.2
NetC4_2: C4.2 U1.30 | length 198.7
  Top Layer w10: C4.2 1687.28,1052.28 1707.36,1072.36 1707.36,1102.72 U1.30
NetC5_1: C5.1 MD1.8 | length 96.9
  Top Layer w10: C5.1 839.28,292.14 MD1.8
NetC7_1: C7.1 U1.3 X1.1 | length 333.4
  Top Layer w10: X1.1 1065.51,1474.02 C7.1 1156.81,1474.02 1192.56,1438.27 U1.3
NetC8_2: C8.2 U1.4 X1.4 | length 350.1
  Top Layer w10: X1.4 1060.91,1337.83 C8.2 1220.87,1337.83 1301.61,1418.58 U1.4
NetC13_2: C13.2 MD2.6 | length 154.6
  Top Layer w10: MD2.6 1449.53,2418.11 1490,2458.58 C13.2
NetC14_2: C14.2 U3.6 | length 82.4
  Top Layer w10: U3.6@2160,505.24 2160,578.62 C14.2@2166.38,585
NetDS1_2: DS1.2 R6.1 | length 81.7
  Top Layer w10: DS1.2 1048.54,789.02 R6.1
NetDS2_2: DS2.2 R7.1 | length 63.7
  Top Layer w10: R7.1 1580,1645.47 DS2.2
NetJ1_1: J1.1 L1.1 MD1.11 | length 436.2
  Top Layer w25: J1.1@460,260 570,260 684.4,145.6 L1.1 761.68,145.6 773.79,157.72 MD1.11
NetJ2_1: J2.1 MD2.9 | length 305.8
  Top Layer w25: J2.1@460,2525 625,2525 675,2575 744.29,2575 MD2.9
NetJ3_1: J3.1 SW3.5 | length 1222.2
  Top Layer w10: SW3.5 3075,1249.29 3075,1511.21 3250,1686.21 3250,2300 J3.1
NetJ3_2: J3.2 SW4.5 | length 1414.8
  Top Layer w10: SW4.5 2500,1265.08 2840,1605.08 2840,1990 J3.2
NetJ3_3: J3.3 SW3.4 | length 1079.6
  Top Layer w10: SW3.4 3185,1600 3265,1680 3265,2227.1 3297.9,2260 J3.3
NetJ3_4: J3.4 SW4.4 | length 1305.6
  Top Layer w10: SW4.4 2615,1254.29 2615,1315 2855,1555 2855,1960 3155,2260 J3.4
NetJ3_5: J3.5 SW3.3 | length 943.1
  Top Layer w10: v1(3282.8,1337.52) 3282.8,1241.49 SW3.3
  Bottom Layer w10: v1(3282.8,1337.52) 3285,1339.72 3285,1420 3272.64,1432.36 3272.64,2122.64 J3.5
NetJ3_6: J3.6 SW4.3 | length 1170
  Top Layer w10: SW4.3 2700,1265.08 2870,1435.08 2870,1885 3145,2160 J3.6
NetJ3_7: J3.7 SW3.2 | length 855.9
  Top Layer w10: SW3.2 v1(3385,1320)
  Bottom Layer w10: J3.7 3390,1980 3390,1325 v1(3385,1320)
NetJ3_8: J3.8 SW4.2 | length 990.5
  Top Layer w10: SW4.2 2815,1254.29 2815,1340 2885,1410 2885,1735 J3.8
NetJ3_9: J3.9 SW3.1 | length 793.2
  Top Layer w10: J3.9 3485,1785 SW3.1
NetJ3_10: J3.10 SW4.1 | length 849.1
  Top Layer w10: SW4.1 2900,1650 J3.10
NetJ6_1: INT.1 MD1.4 | length 395.9
  Top Layer w10: INT.1 738.34,498.34 764.92,524.92 833.03,524.92 MD1.4
NetQ1_1: Q1.1 R4.2 R5.2 | length 156.8
  Top Layer w10: R4.2@2415.59,485 2415.59,413.13 2418.72,410 2420.59,408.13 Q1.1@2420.59,330.32
NetR2_2: R2.2 U1.60 | length 156.3
  Top Layer w10: R2.2 1502.8,1698.03 1531.1,1669.72 U1.60
NRST: C2.1 P5.5 SW1.2 U1.7 | length 1517.5
  Top Layer w10: C2.1 1122.8,993.62 1139.45,1010.28 1139.45,1013.23 1171.54,1045.31 SW1.2@1171.54,1125 ; SW1.2 1191.38,1128.62 v1(1195,1125) ; U1.7 1374.53,1358.62 1441.38,1358.62 v1(1445,1355) ; P5.5@2199.23,1188.62 P5.5
  Bottom Layer w10: v1(1195,1125) 1425,1355 v1(1445,1355) 1495.37,1304.63 1511.71,1304.63 1706.35,1110 1839.5,1110 1859.5,1130 2156.22,1130 P5.5
RELAY_SIG: P7.7 U1.34 | length 1252.5
  Top Layer w10: U1.34 1827.28,1202.95 1882.95,1202.95 v1(1890,1210)
  Bottom Layer w10: v1(1890,1210) 1923.15,1210 2047.2,1334.06 2234.06,1334.06 2680,1780 2680,1838.86 P7.7
RF_MISO: MD2.2 U1.52 | length 763.4
  Top Layer w10: MD2.2 1451.85,2103.15 1715,1840 1715,1700 1688.58,1673.58 U1.52
RF_MOSI: MD2.3 U1.53 | length 1041.3
  Top Layer w10: MD2.3 1276.89,2181.89 1235,2140 1235,2095 1234.14,2094.14 1263.28,2065 1465,2065 1695,1835 1695,1704.28 1672.68,1681.96 1672.68,1577.87 1668.9,1574.09 U1.53
RF_NSS: MD2.5 U1.50 | length 984.5
  Top Layer w10: MD2.5 1404.33,2339.37 1750,1993.7 1750,1665 1727.95,1642.95 U1.50
RF_SCK: MD2.4 U1.51 | length 917.9
  Top Layer w10: MD2.4 1439.37,2260.63 1475,2225 1475,2110 1730,1855 1730,1680 1708.27,1658.27 U1.51
Servo: P2.3 Q1.3 | length 119.7
  Top Layer w10: P2.3@2395,150 Q1.3@2395,269.68
Servo_filtered_current: C15.2 R3.2 U2.3 | length 159.2
  Top Layer w10: U2.3@2017.24,662.4 2166.02,662.4 C15.2@2173.43,655
Servo_out: R4.1 U1.28 | length 1249
  Top Layer w10: U1.28 1668.9,1055.6 1670,1054.5 1670,1025.5 1668.9,1024.4 1668.9,998.9 1635,965 1635,885 1670,850 v1(1745,850) ; v1(2360,530) 2360,489.41 R4.1@2364.41,485
  Bottom Layer w10: v1(1745,850) 1780,885 1910.87,885 1945.87,850 2140,850 2370.86,619.14 2370.86,610.86 2360,600 v1(2360,530)
Servo_raw_current: R3.1 U3.7 | length 98.1
  Top Layer w10: R3.1@2105,601.28 2110,596.28 U3.7@2110,505.24
Servo_SCL: SW5.2 U2.4 | length 89.4
  Top Layer w10: SW5.2@1834.41,665 1835.71,663.7 1921.46,663.7 U2.4@1922.76,662.4
Servo_SDA: SW5.1 U2.5 | length 99.7
  Top Layer w10: SW5.1@1834.41,615 1844.45,615 1871.85,587.6 U2.5@1922.76,587.6
SWO: P5.6 U1.55 | length 832.1
  Top Layer w10: U1.55 1628.62,1555.47 1628.62,1471.88 1730.5,1370 1750,1370 v1(1772.5,1347.5) ; v1(1917.75,1347.25) 1920.5,1350 1953.46,1350 P5.6
  Bottom Layer w10: v1(1772.5,1347.5) 1772.63,1347.37 1917.63,1347.37 v1(1917.75,1347.25)
TCK: P5.2 U1.49 | length 610.5
  Top Layer w10: U1.49 1747.38,1556.64 1747.38,1587.38 1825,1665 2050,1665 2214.84,1500.16 P5.2
TGPS_PULSE: DS1.1 MD1.3 T_PUL.1 | length 429.6
  Top Layer w10: MD1.3 913.98,578.98 985.48,650.48 DS1.1 904.34,785 884.34,805 T_PUL.1
TMS: P5.4 U1.46 | length 450.4